# EAGLE board supply (EAGLE 9.6.2)
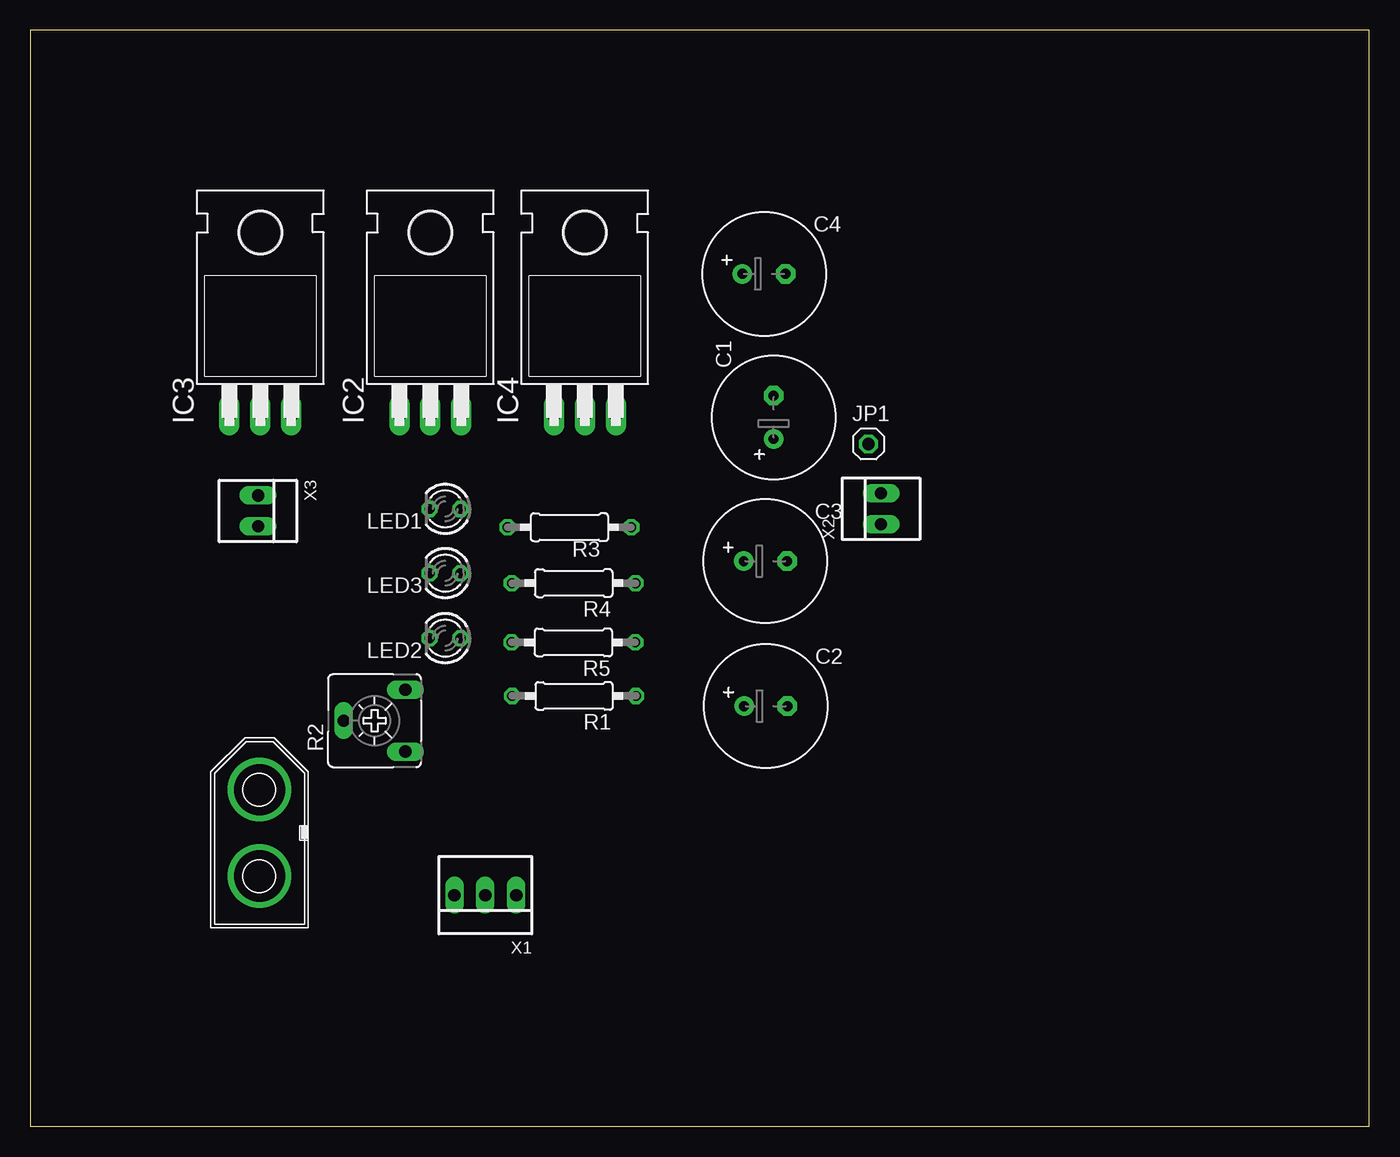
[diagram p0: board, top side]
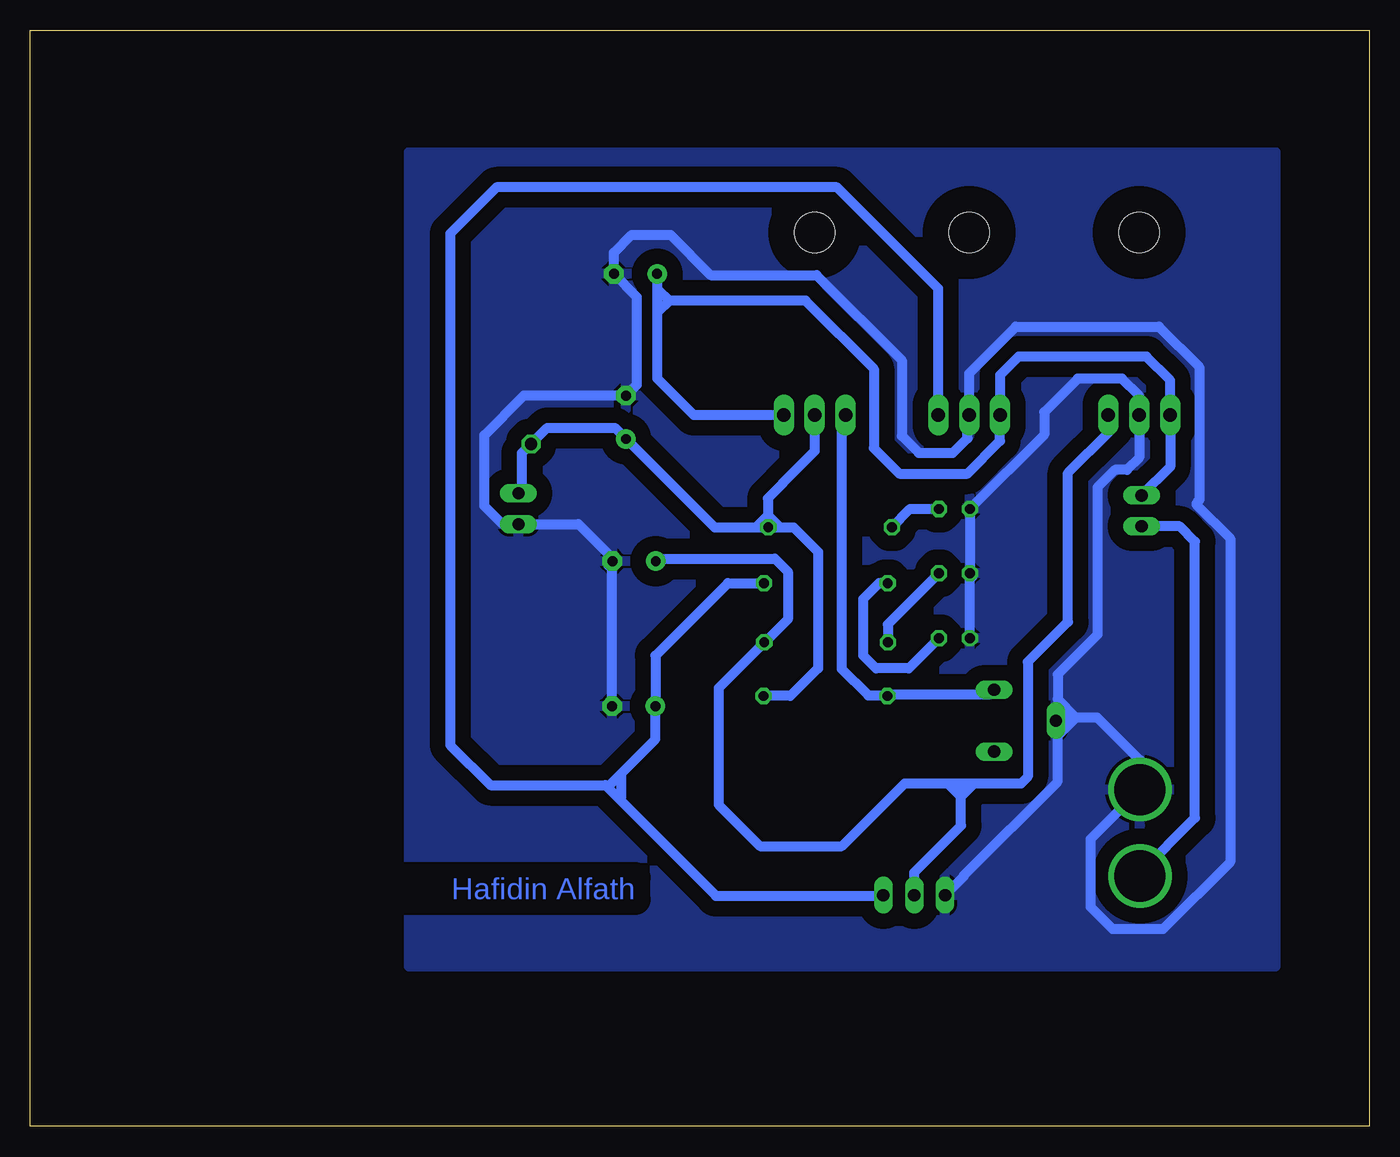
[diagram p1: board, bottom side, seen from below]

Size 110 x 90 mm. Coordinates in mm from the lower left corner, seen from the top.
Outline: 0,0 110,0 110,90 0,90 0,0
Copper layers (1*16): Top 0.035mm / dielectric 1.5mm / Bottom 0.035mm
Design rules "default": minimum track width 6mil, minimum drill 0.35mm, track to track 6mil, track to pad 6mil, pad to pad 6mil, via to via 6mil, smd to smd 6mil, copper to edge 40mil, drill to drill 6mil, minimum pad ring 10mil, minimum via ring 8mil, stop-mask expansion 4mil, vias tented up to drill 0mil, thermal gap 10mil

## Footprints (pad centres in the part's own frame; a part is rotated, then mirrored left to right if it is on the bottom)
E3,5-10 = drill 0.813 pad 1.6: + -1.778,0 | drill 0.813 pad 1.6 octagon: - 1.778,0
TO220H = drill 1.118 long: 1 -2.54,-10.16; 2 0,-10.16; 3 2.54,-10.16 | hole 3.302: 0,4.826
1X01 = drill 1.016 octagon: 1 0,0
LED3MM = drill 0.813 octagon: A -1.27,0; K 1.27,0
0207/10 = drill 0.813 octagon: 1 -5.08,0; 2 5.08,0
CA6V = drill 1.016 long: A -2.54,-2.54; E 2.54,-2.54; S 0,2.54
CON-XT60M = drill 4.2: V+ -3.55,0; V- 3.55,0
22-23-2031 = drill 1 long: 1 -2.54,0; 2 0,0; 3 2.54,0
22-23-2021 = drill 1 long: 1 -1.27,0; 2 1.27,0

## Placement (x,y rotation side)
C1  1000uF/16V  [E3,5-10]  61.06,58.22 90 top
C2  1000uF/16V  [E3,5-10]  60.42,34.5 0 top
C3  1000uF/16V  [E3,5-10]  60.39,46.4 0 top
C4  1000uF/16V  [E3,5-10]  60.28,70 0 top
IC2  7805T  [TO220H]  32.86,68.58 0 top
IC3  7805T  [TO220H]  18.89,68.58 0 top
IC4  317T  [TO220H]  45.56,68.58 0 top
JP1  [1X01]  68.86,56.04 0 top
LED1  [LED3MM]  34.08,50.69 180 top
LED2  [LED3MM]  34.08,40.07 180 top
LED3  [LED3MM]  34.08,45.41 180 top
R1  1K2  [0207/10]  44.67,35.33 180 top
R2  20K  [CA6V]  28.28,33.3 90 top
R3  1K  [0207/10]  44.29,49.19 180 top
R4  1K  [0207/10]  44.64,44.6 180 top
R5  1K  [0207/10]  44.62,39.73 180 top
VIN  [CON-XT60M]  18.83,24.09 90 top
X1  VSYS  [22-23-2031]  37.38,18.97 180 top
X2  VMOT  [22-23-2021]  69.9,50.71 90 top
X3  switch  [22-23-2021]  18.7,50.53 270 top

## Library data of the parts
C1-C4 R1 R3-R5 = rcl
IC2-IC4 = linear
JP1 = pinhead
LED1-LED3 = led
R2 = pot
VIN = con-XT60M
X1 = con-molex; MF: MOLEX; MPN: 22-23-2031; OC_FARNELL: 1462950; OC_NEWARK: 30C0862
X2 X3 = con-molex; MF: MOLEX; MPN: 22-23-2021; OC_FARNELL: 1462926; OC_NEWARK: 25C3832

## Nets
+12V: C3.+ IC3.3 R5.1 X1.2
GND: C1.- C2.- C3.- C4.- IC2.2 IC3.2 LED1.K LED2.K LED3.K R2.S VIN.V- X1.3 X2.1
N$1: IC4.1 R1.2 R2.E
N$2: LED1.A R3.2
N$3: LED3.A R5.2
N$4: VIN.V+ X3.2
N$5: LED2.A R4.2
VCC: C2.+ IC2.3 R4.1 X1.1
VDD: C1.+ IC4.2 JP1.1 R1.1 R3.1 X2.2
VPP: C4.+ IC2.1 IC3.1 IC4.3 X3.1

## Tracks (layer width: path | path; a pad name or v marks a point on that pad's centre or on a via)
+12V
  Bottom 0.813: C3.+ 58.39,46.62 48.83,46.62 47.76,45.55 47.76,41.62 49.65,39.73 R5.1 53.45,35.98 53.45,26.4 50.04,22.99 43.33,22.99 38.16,28.16 34.64,28.16 | IC3.3 21.43,57.03 21.4,57 24.75,53.65 24.75,41.42 28.04,38.13 28.04,28.71 28.59,28.16 32.44,28.16 | 33.76,28.16 33.54,27.94 33.54,27.06 | 34.64,28.16 33.76,28.16 | 33.76,28.16 32.44,28.16 | 33.54,27.06 33.54,24.68 37.38,20.84 X1.2 | 32.44,28.16 33.54,27.06 | 33.54,27.06 34.64,28.16
GND
  Bottom 0.813: 62.53,46.04 C3.- | 62.17,69.89 C4.- | LED3.K LED1.K 26.7,56.8 26.7,58.64 23.94,61.4 20.3,61.4 18.89,59.99 IC3.2 | IC3.2 19,58.31 | 32.56,45.16 LED3.K | LED2.K LED3.K | C4.- 62.06,71.74 60.6,73.2 57.4,73.2 54.1,69.9 45.4,69.9 38.4,62.9 38.4,56.7 37,55.3 34.2,55.3 33,56.5 33,58.56 IC2.2 32.86,61.84 29.03,65.67 17.26,65.67 13.96,62.37 13.96,51.37 14.18,51.15 14.18,51.04 11.42,48.28 11.42,21.68 16.93,16.17 21.06,16.17 22.9,18.01 22.9,23.57 VIN.V- 18.83,30.06 22.33,33.56 24.08,33.56 | IC3.2 18.89,54.91 19.9,53.9 20.89,53.9 22.32,52.47 22.32,40.37 25.59,37.1 25.59,35.07 | 24.08,33.56 25.48,33.56 | 25.48,33.56 25.59,33.56 25.59,35.07 | 25.48,33.56 R2.S 25.63,33.19 25.63,32.01 | 24.08,33.56 25.59,35.07 | 25.63,32.01 25.63,28.26 33.3,20.59 33.3,20.51 X1.3 | 24.08,33.56 25.63,32.01 | 62.17,45.73 C3.- | C2.- 62.2,46.37 C3.- | C3.- 62.17,46.65 64.96,49.44 X2.1 71.21,49.44 72.7,50.93 72.7,56.76 69.46,60 C1.- 60.18,60.88 60.18,68.12 C4.-
  pour Bottom (isolate 1.27): 7.7,80 7.7,13.1 78.9,13.1 78.9,80
N$1
  Bottom 0.813: R2.E 31.2,35.46 39.46,35.46 R1.2 39.63,35.37 41.15,35.37 43.34,37.56 43.34,58.1 IC4.1
N$2
  Bottom 0.813: R3.2 37.71,50.69 LED1.A
N$3
  Bottom 0.813: 35.39,45.45 LED3.A 39.54,41.22 R5.2
N$4
  Bottom 0.813: VIN.V+ 18.83,20.78 14.3,25.31 14.3,48 15.56,49.26 X3.2
N$5
  Bottom 0.813: LED2.A 37.83,37.6 40.51,37.6 41.55,38.64 41.55,43.31 40.26,44.6 R4.2
VCC
  Bottom 0.813: R4.1 52.69,44.6 58.64,38.65 C2.+ 58.64,31.78 61.48,28.93 | IC2.3 35.4,68.79 43.71,77.1 71.7,77.1 75.5,73.3 75.5,31.3 72.2,28 62.75,28 61.59,26.84 | 62.53,27.89 61.48,28.93 | X1.1 39.97,18.92 53.67,18.92 61.59,26.84 | 61.48,28.93 61.48,26.95 61.59,26.84
VDD
  Bottom 0.813: 45.5,58.48 IC4.2 45.56,55.44 48.17,52.83 48.17,52.79 49.4,51.56 49.4,50.16 | 48.39,49.17 49.35,49.17 R3.1 49.39,49.17 | 48.39,49.17 47.29,49.17 45.28,47.16 45.28,37.6 47.55,35.33 R1.1 | 50.39,49.17 53.79,49.17 C1.+ 61.98,57.36 67.54,57.36 JP1.1 69.63,55.27 69.63,52.25 X2.2 | 50.39,49.17 49.39,49.17 | 49.4,50.16 49.4,49.18 49.39,49.17 | 48.39,49.17 49.38,50.16 49.4,50.16 | 49.4,50.16 50.39,49.17
VPP
  Bottom 0.813: X3.1 16.35,54.15 IC3.1 16.35,61.25 18.3,63.2 28.8,63.2 30.32,61.68 IC2.1 30.32,56.28 33,53.6 38.6,53.6 40.7,55.7 40.7,62.2 46.3,67.8 57.5,67.8 | 58.5,66.8 C4.+ 58.5,68.8 57.5,67.8 | 58.5,66.8 58.5,61.42 55.5,58.42 IC4.3 | 57.5,67.8 58.5,66.8

## Text on the board
Bottom: Hafidin Alfath